# Altium PCB AICat V1.3.双面板 板厚1.6mm.PcbDoc (part 1 of 3)
Units mm, origin at the board's own origin, x right, y up, seen from the top; angles counter-clockwise.
Board outline 152.4 x 101.6 mm, 2 copper layers (Top Layer, Bottom Layer); 95 components, 81 nets, 296 pads, 205 vias.
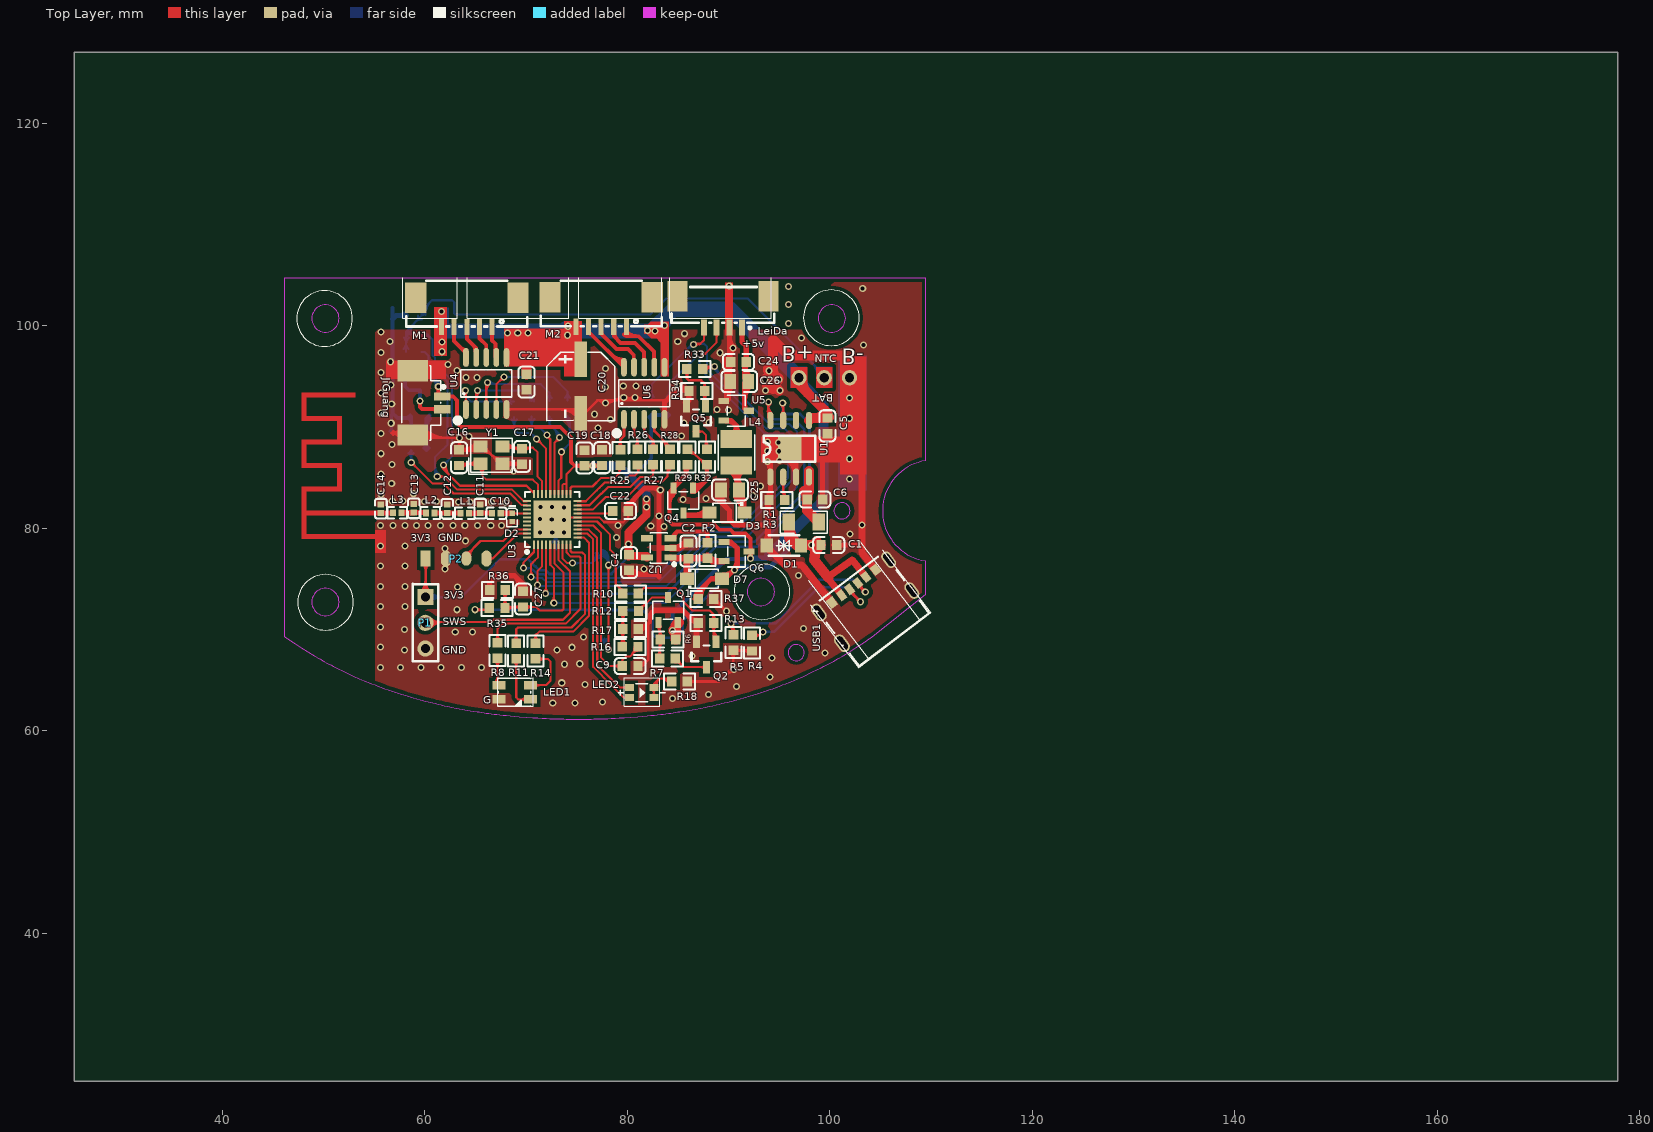
[diagram p0: Top Layer view]
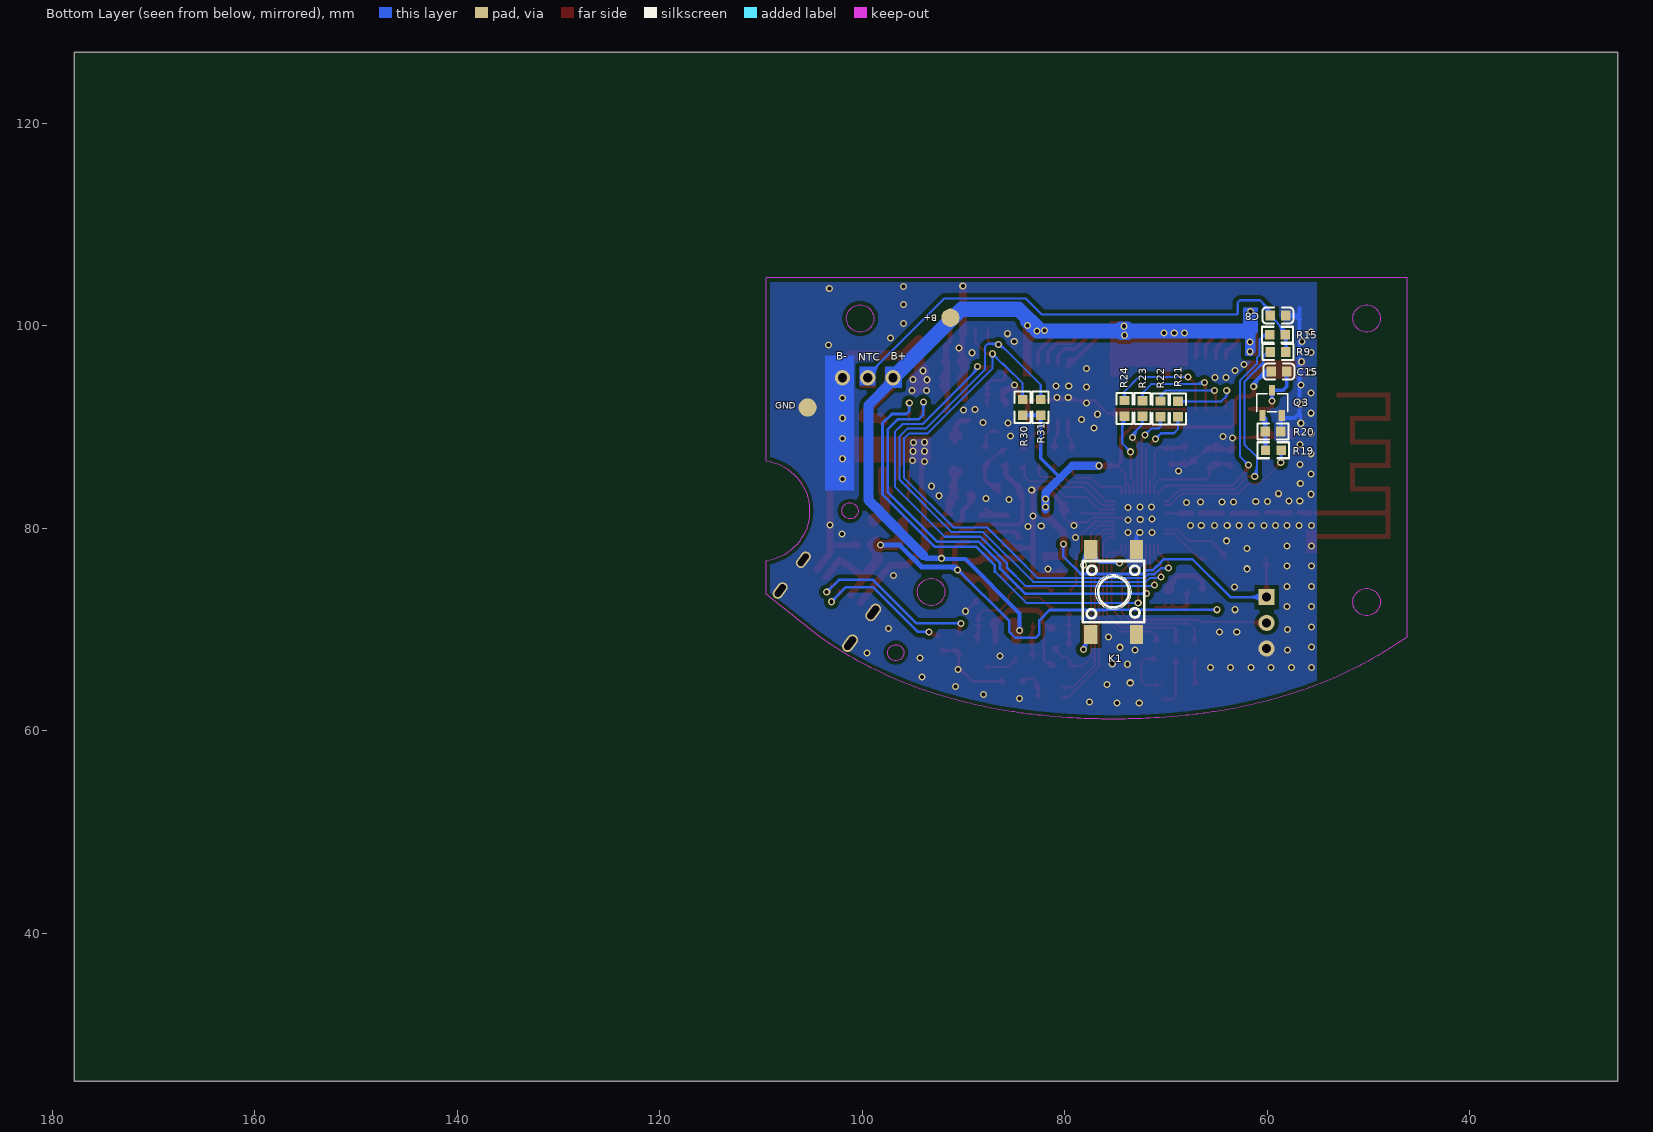
[diagram p1: Bottom Layer view, seen from below]
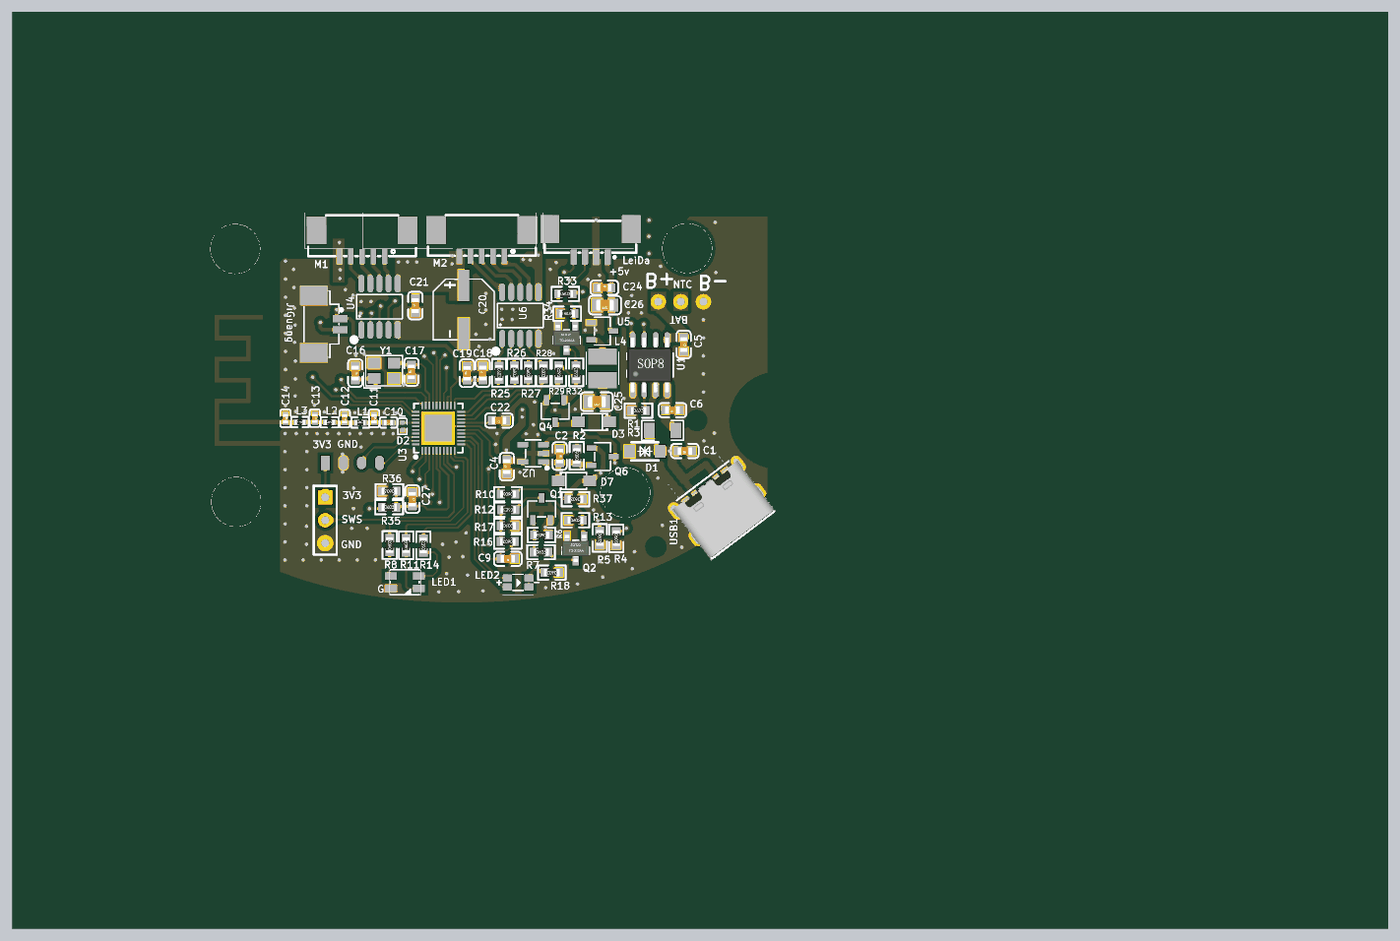
[diagram p4: 3D render of the assembled board from above, using the file's embedded part models]
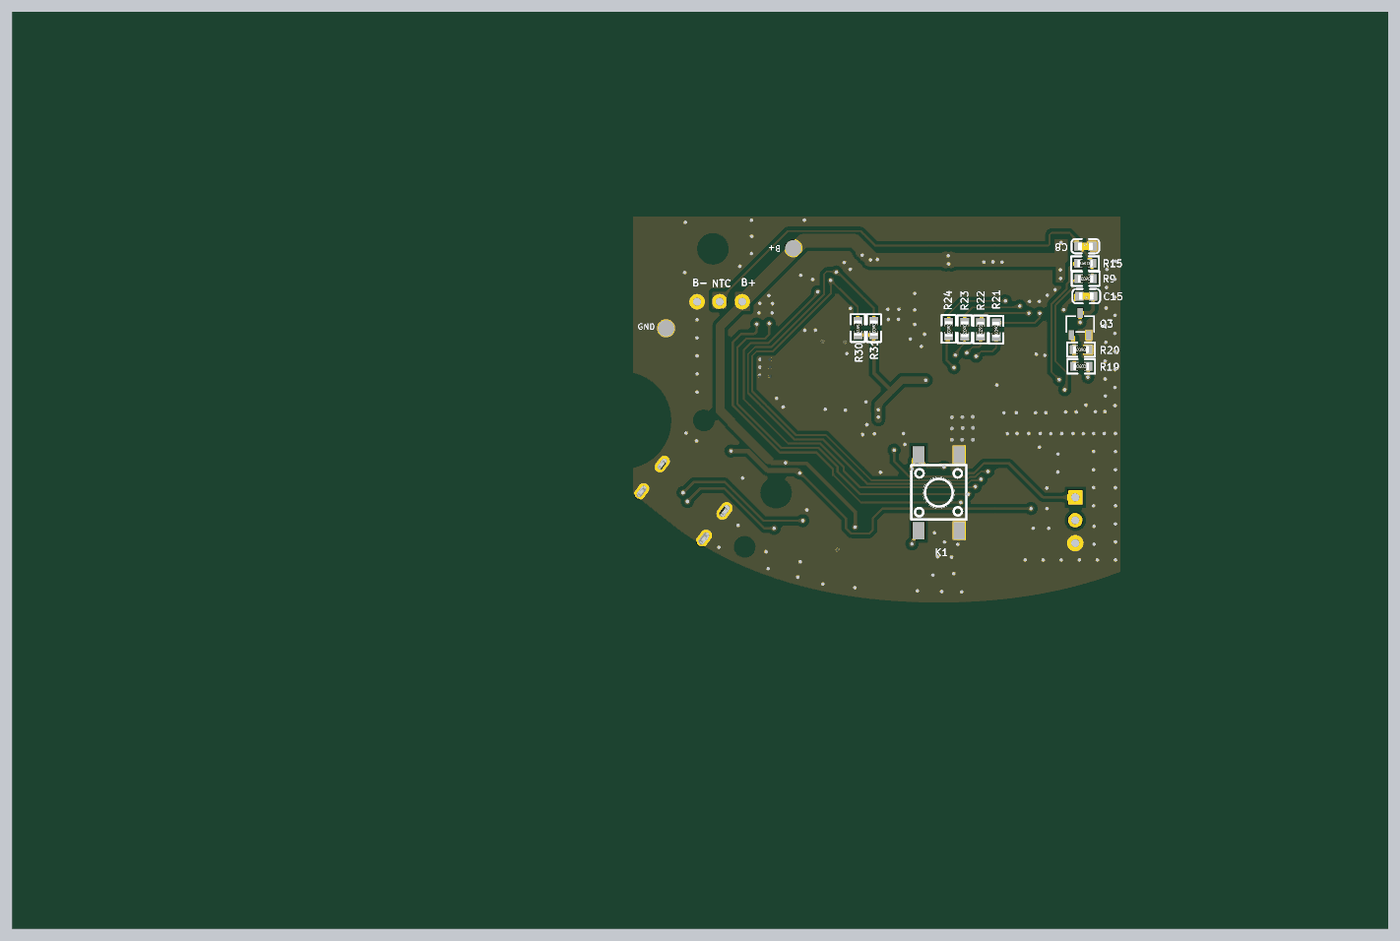
[diagram p5: 3D render of the assembled board from below, using the file's embedded part models]

## Layer stack, top to bottom
Top Solder: solder mask 0.0102, Solder Resist, Dk 3.5
Top Layer: signal copper 0.0356
Dielectric1: dielectric 0.32, FR-4, Dk 4.8
Bottom Layer: signal copper 0.0356
Bottom Solder: solder mask 0.0102, Solder Resist, Dk 3.5

## Board outline
25.4,25.4 177.8,25.4 177.8,127 25.4,127

## Design rules (kind name [scope] priority, off if disabled: settings)
Clearance [All] p1: gap=0.178 ignorepadtopadclearanceinfootprint=FALSE except(0: Arc-Hole Track-Hole SMDPad-Hole THPad-Hole Via-Hole Fill-Hole Poly-Hole Region-Hole Text-Hole)
ComponentClearance [All] p1: gap=0 collisioncheckmode=3 verticalgap=0 showdistances=FALSE
FabricationTestPointUsage TestPointUsage [All] p1: valid=0 allowmultiple=FALSE
FabricationTestpoint Testpoint [All] p1: side=3 testpointundercomponent=TRUE minsize=1.016 maxsize=2.54 preferedsize=1.524 minholesize=0 maxholesize=1.016 preferedholesize=0.813 testpointgrid=0.025 allowsidetop=TRUE allowsidebottom=TRUE usegrid=TRUE gridtolerance=0
HoleToHoleClearance [All] p1: gap=0.102 allowstackedmicrovias=TRUE
MinimumSolderMaskSliver [All] p1: minsoldermaskwidth=0.051
PolygonConnect [All] p1: connectstyle=Direct reliefconductorwidth=0.254 reliefentries=4 polygonreliefangle="90 Angle" airgapwidth=0.254
RoutingVias [All] p1: holewidth=0.711 width=1.27 viastyle="Through Hole" minholewidth=0.711 minwidth=1.27 maxholewidth=0.711 maxwidth=1.27
SilkToSilkClearance [All] p1: silktosilkclearance=0.051
SilkToSolderMaskClearance SilkscreenOverComponentPads [IsPad] p1: minsilkscreentomaskgap=0 clearancetoexposedcopper=TRUE
SolderMaskExpansion [All] p1: expansion=0.102
Width [All] p1: maxlimit=2.54 minlimit=0.203 preferedwidth=0.254 minimp=50.000000 maximp=50.000000 favimp=50.000000
23 further rules are at their usual default settings.

## Components (designator, comment, footprint, x,y, rotation, side; value= is the part's Value field where it differs from the comment)
B+ "J-CSD" TP 91.288,100.787 r270 bottom (schematic designator TP3)
BAT "BX-PH2.0-3PWT" HDR-TH_3P-P2.50_ZX-XH2.54-3PWZ 100.152,99.009 r180 top (schematic designator BAT1)
C1 "0.1uF" 0603_C 99.898,78.334 r180 top
C2 "1uf" 0603_C 86.03,77.775 r270 top
C4 "10uF" 0603_C 80.188,76.606 r90 top
C5 "10uf" 0603_C 99.771,90.119 r270 top
C6 "10UF" 0603_c 98.527,82.855 r180 top
C8 "100nF" 0603_C 58.953,101.016 r180 bottom
C9 "100nF" 0603_C 80.289,66.396 r180 top
C10 "220pF" 0402_c 67.081,81.483 r180 top
C11 "NC" 0402_C 65.481,81.94 r270 top
C12 "NC" 0402_C 62.23,81.915 r270 top
C13 "NC" 0402_C 58.928,81.966 r270 top
C14 "NC" 0402_C 55.677,81.94 r270 top
C15 "0.1uf/25v" 0603_C 58.852,95.479 r0 bottom
C16 "12PF" 0603_c 63.398,86.97 r270 top
C17 "12PF" 0603_c 69.621,87.097 r90 top
C18 "1UF" 0603_c 77.521,86.97 r90 top
C19 "1UF" 0603_c 75.768,86.944 r90 top
C20 "220uF/10V" "SMD 6.3*5.4 电解" 75.387,93.853 r270 top
C21 "100nf" 0603_C 70.053,94.437 r90 top
C22 "1UF" 0603_c 79.324,81.712 r180 top
C24 "0.1uF" 0603_C 90.983,96.418 r0 top
C25 "22uf-16v" 0805_c 90.145,83.795 r180 top
C26 "22uf-16v" 0805_c 91.059,94.488 r180 top
C27 "0.1uF" 0603_C 69.723,73 r270 top
D1 "SMF5.0CA_C726939" "SOD-123 双向" 95.631,78.232 r0 top
D2 "SE6V3LHN102T 6.3v单向" 0402-D 68.758,81.001 r270 top
D3 "DSK24" SOD-123FL 89.687,81.382 r180 top
D7 "" SOD-123FL 87.782,75.184 r0 top
GND "J-CSD" TP 105.385,91.923 r270 bottom (schematic designator TP3)
JiGuang "JiGuang" CONN-SMD_2P-P1.25-LT 60.274,92.38 r270 top (schematic designator CN1)
K1 "KEY" KEY_SMD_4P 75.184,73.762 r270 bottom locked
L1 "0R" 0402_R 63.957,81.483 r180 top
L2 "0R" 0402_R 60.554,81.509 r180 top
L3 "0R" 0402_R 57.277,81.534 r180 top
L4 "47uH" IND-SMD_L3.5-W3.0_CD31 90.78,87.503 r90 top
LED1 "XL-A3528RGBC-BM" LED-ARRAY-SMD_4P-L3.2-W2.8-LS3.5-BL_XL-A3528RGBC-BM 68.885,63.805 r0 top
LED2 "*" LED-SMD_4P-L3.2-W1.6-TL_XL-3216SURUGC 81.432,63.779 r0 top
LeiDa "HC-1.25-4PLT" CONN-SMD_4P-P1.25_LT 89.459,101.371 r180 top (schematic designator CN2)
M1 "MOTORA" CONN-SMD_1.25-5PLT 64.16,101.321 r180 top (schematic designator J1)
M2 "MOTORB" CONN-SMD_1.25-5PLT 77.419,101.346 r180 top (schematic designator J2)
P1 "DEBUG" SIP4-2.54#1 60.071,75.743 r270 top (schematic designator P2)
P2 "UART" SIP4-2.54#2 60.096,77.013 r0 top
Q1 "SI2301 P" SOT-23 84.252,71.399 r270 top
Q2 "S8050" SOT-23(SOT-23-3) 87.808,67.539 r90 top
Q3 "AO3400" SOT-23 59.309,91.872 r270 bottom
Q4 "SI2301 P" SOT-23 85.319,83.261 r90 top
Q5 "S8050" SOT-23(SOT-23-3) 86.792,90.83 r90 top
Q6 "CJ3401" SOT-23 90.272,77.495 r180 top
R1 "1.3k" 0603_R 94.767,82.804 r0 top
R2 "10k" 0603_R 87.935,77.8 r90 top
R3 "R250" 1206_R 97.282,80.569 r180 top
R4 "5.1K" 0603_R 92.304,68.656 r270 top
R5 "5.1K" 0603_R 90.475,68.707 r270 top
R6 "560K" 0603_R 84.023,69.037 r180 top
R7 "1K" 0603_R 83.972,67.132 r0 top
R8 "1k" 0603_R 67.208,67.92 r90 top
R9 "10k" 0603_R 58.928,97.409 r0 bottom
R10 "1K" 0603_r 80.315,73.558 r180 top
R11 "1k" 0603_R 69.037,67.894 r90 top
R12 "560K" 0603_R 80.34,71.831 r180 top
R13 "10K" 0603_r 87.782,70.663 r0 top
R14 "1k" 0603_R 70.942,67.869 r90 top
R15 "100R" 0603_R 58.979,99.111 r180 bottom
R16 "1K" 0603_R 80.289,68.301 r180 top
R17 "100K" 0603_R 80.315,70.053 r0 top
R18 "1K" 0603_R 85.166,64.872 r180 top
R19 "330R" 0603_R 59.411,87.706 r180 bottom
R20 "10K" 0603_R 59.436,89.56 r0 bottom
R21 "330R" 0603_R 68.834,91.77 r270 bottom
R22 "330R" 0603_R 70.561,91.796 r270 bottom
R23 "330R" 0603_R 72.314,91.821 r270 bottom
R24 "330R" 0603_R 74.092,91.846 r270 bottom
R25 "330R" 0603_R 79.324,86.995 r270 top
R26 "330R" 0603_R 81.026,87.02 r270 top
R27 "330R" 0603_R 82.55,87.046 r270 top
R28 "330R" 0603_R 84.226,87.046 r270 top
R29 "560K" 0603_R 85.954,87.046 r90 top
R30 "10K" 0603_R 84.15,91.948 r270 bottom
R31 "10K" 0603_R 82.372,91.948 r270 bottom
R32 "1K" 0603_R 87.859,87.046 r90 top
R33 "1K" 0603_r 86.665,95.733 r0 top
R34 "10K" 0603_r 86.868,93.548 r0 top
R35 "10K" 0603_R 67.158,72.111 r0 top
R36 "20K" 0603_R 67.183,73.889 r180 top
R37 "10K" 0603_R 87.782,73 r180 top
U1 "TP4056X" SOP8-9 96.037,87.859 r0 top
U2 "SSP7615" SOT-23-5 82.931,77.622 r180 top
U3 "TLSR8208C" QFN-40_L5.0-W5.0-P0.40-BL-EP3.7 72.644,80.797 r0 top
U4 "ULN2802" ESSOP-10 66.218,94.107 r0 top
U5 "HE9116A50NR" SOT-23 90.246,91.389 r180 top
U6 "ULN2802" ESSOP-10 81.813,93.142 r0 top
USB1 "TYPE-C 6P" TPYE-C-6 103.505,72.771 r127 top
Y1 "24MHz +-20PPM" CRYSTAL-SMD_4P-L3.2-W2.5 66.878,87.173 r0 top

## Footprints (in the part's own frame and the unit in brackets; to place one, negate y for a bottom-side part, rotate by r counter-clockwise, add the part's x,y. Pads: shape width x height; smd on the part's side, far side on the other; paste and mask are expansions set on the pad)
0402-D [mm]
  rect 0.505x0.551 smd paste-100 mask+0.051: 1(-0.484,-0.131) 2(0.349,-0.131)
  silkscreen extent -1.27,-0.64 0.83,0.37
0402_c [mm]
  rect 0.6x0.65 smd: 1(-0.425,0) 2(0.425,0)
  silkscreen extent -0.98,-0.58 0.98,0.58, body extent -0.48,-0.3 0.52,0.3, height 0.2
0402_C [mm]
  rect 0.6x0.65 smd: 1(-0.425,0) 2(0.425,0)
  silkscreen extent -0.98,-0.58 0.98,0.58, body extent -0.48,-0.3 0.52,0.3, height 0.2
0402_R [mm]
  rect 0.6x0.65 smd: 1(-0.425,0) 2(0.425,0)
  silkscreen extent -0.97,-0.58 0.97,0.58, body extent -0.57,-0.27 0.58,0.28, height 0.41
0603_C [mm]
  rect 0.93x0.98 smd: 1(-0.77,0) 2(0.77,0)
  silkscreen extent -1.54,-0.79 1.54,0.79, body extent -0.8,-0.4 0.8,0.4, height 0.3
0603_c [mm]
  rect 0.93x0.98 smd: 1(-0.77,0) 2(0.77,0)
  silkscreen extent -1.54,-0.79 1.54,0.79, body extent -0.8,-0.4 0.8,0.4, height 0.3
0603_R [mm]
  rect 0.93x0.98 smd: 1(-0.77,0) 2(0.77,0)
  silkscreen extent -1.53,-0.79 1.54,0.79, body extent -0.85,-0.4 0.85,0.4, height 0.56
0603_r [mm]
  rect 0.93x0.98 smd: 1(-0.77,0) 2(0.77,0)
  silkscreen extent -1.53,-0.79 1.54,0.79, body extent -0.85,-0.4 0.85,0.4, height 0.56
0805_c [mm]
  rect 1.16x1.47 smd: 1(-0.89,0) 2(0.89,0)
  silkscreen extent -1.77,-1.04 1.77,1.04, body extent -1,-0.62 1,0.63, height 0.77
1206_R [mm]
  rect 1.208x1.701 smd: 1(-1.631,-0.039) 2(1.326,-0.039)
  silkscreen extent -2.46,-1.12 2.16,1.04
CONN-SMD_1.25-5PLT [mm]
  rect 0.5x1.6 smd paste+0.051: 1(-2.5,1.45) 2(-1.25,1.45) 3(0,1.45) 4(1.25,1.45) 5(2.5,1.45)
  rect 2.1x3 smd paste+0.051: 6(-5.05,-1.45) 7(5.05,-1.45)
  silkscreen extent -5.97,-3.12 5.97,1.4
CONN-SMD_2P-P1.25-LT [mm]
  rect 0.8x1.6 smd paste+0 mask+0.05: 1(-0.625,1.45) 2(0.625,1.45)
  rect 2.1x3 smd paste+0 mask+0.05: 3(-3.175,-1.45) 4(3.175,-1.45)
  silkscreen extent -3.68,-2.55 3.68,1.73
CONN-SMD_4P-P1.25_LT [mm]
  rect 0.6x1.6 smd paste+0.051: 1(-1.875,1.55) 2(-0.625,1.55) 3(0.625,1.55) 4(1.875,1.55)
  rect 2x3 smd paste+0.051: 5(-4.5,-1.55) 6(4.5,-1.55)
  silkscreen extent -5.06,-2.45 5.09,1.7
CRYSTAL-SMD_4P-L3.2-W2.5 [mm]
  rect 1.4x1.2 smd: 1(-1.383,-0.797) 2(0.817,-0.797) 3(0.817,0.903) 4(-1.383,0.903)
  silkscreen extent -2.54,-1.85 1.75,1.73
ESSOP-10 [mm]
  oval 0.56x1.855 smd paste+0.051: 1(-2.141,-2.375) 2(-1.141,-2.375) 3(-0.141,-2.375) 4(0.859,-2.375) 5(1.859,-2.375) 6(1.859,2.765) 7(0.859,2.765) 8(-0.141,2.765) 9(-1.141,2.765) 10(-2.141,2.765)
  silkscreen extent -2.67,-1.14 2.39,1.53
HDR-TH_3P-P2.50_ZX-XH2.54-3PWZ [mm]
  round 1.5 hole 0.9: 1(-1.801,4.145) 2(0.699,4.145) 3(3.199,4.145)
IND-SMD_L3.5-W3.0_CD31 [mm]
  rect 1.8x3.12 smd: 1(-1.303,0) 2(1.303,0)
  silkscreen extent -1.75,-1.8 1.75,1.8
KEY_SMD_4P [mm]
  rect 1.9x1.3 smd: 1(-4.155,2.252) 2(4.244,2.252) 3(-4.155,-2.247) 4(4.244,-2.247)
  silkscreen extent -3.01,-3.05 3.02,3.05
LED-ARRAY-SMD_4P-L3.2-W2.8-LS3.5-BL_XL-A3528RGBC-BM [mm]
  rect 1.3x0.82 smd paste+0 mask+0.05: 1(-1.55,-0.7) 2(-1.55,0.7) 3(1.55,-0.7) 4(1.55,0.7)
  silkscreen extent -1.6,-1.4 1.6,1.4
LED-SMD_4P-L3.2-W1.6-TL_XL-3216SURUGC [mm]
  rect 0.9x0.7 smd paste+0.051: 1(-1.2,0.5) 2(1.2,0.5) 3(-1.2,-0.5) 4(1.2,-0.5)
  silkscreen extent -2.33,-0.89 2.3,0.89
QFN-40_L5.0-W5.0-P0.40-BL-EP3.7 [mm]
  rect 0.2x0.8 smd paste-100 mask+0.05: 1(-1.847,-2.425) 2(-1.447,-2.425) 3(-1.047,-2.425) 4(-0.647,-2.425) 5(-0.247,-2.425) 6(0.153,-2.425) 7(0.553,-2.425) 8(0.953,-2.425) 9(1.353,-2.425) 10(1.753,-2.425) 21(1.753,2.573) 22(1.353,2.573) 23(0.953,2.573) 24(0.553,2.573) 25(0.153,2.573) 26(-0.247,2.573) 27(-0.647,2.573) 28(-1.047,2.573) 29(-1.447,2.573) 30(-1.847,2.573)
  rect 0.8x0.2 smd paste-100 mask+0.05: 11(2.452,-1.726) 12(2.452,-1.326) 13(2.452,-0.926) 14(2.452,-0.526) 15(2.452,-0.126) 16(2.452,0.274) 17(2.452,0.674) 18(2.452,1.074) 19(2.452,1.474) 20(2.452,1.874) 31(-2.546,1.874) 32(-2.546,1.474) 33(-2.546,1.074) 34(-2.546,0.674) 35(-2.546,0.274) 36(-2.546,-0.126) 37(-2.546,-0.526) 38(-2.546,-0.926) 39(-2.546,-1.326) 40(-2.546,-1.726)
  rect 3.7x3.7 smd paste-100 mask+0.05: 41(-0.047,0.074)
  silkscreen extent -2.75,-3.28 2.65,2.77
SIP4-2.54#1 [mm]
  rect 1.6x1.6 hole 0.9: 2(2.54,0)
  round 1.6 hole 0.9: 3(5.08,0) 4(7.62,0)
  silkscreen extent 1.24,-1.27 8.89,1.27
SIP4-2.54#2 [mm]
  rect 1x1.6 smd: 1(0,0)
  oval 1x1.6 smd: 2(2,0) 4(6,0)
  oval 1x1.4 smd: 3(4,0)
"SMD 6.3*5.4 电解" [mm]
  rect 3.5x1.2 smd: 1(-2.822,0.023) 2(2.518,0.023)
  silkscreen extent -3.53,-3.35 3.22,3.4
"SOD-123 双向" [mm]
  rect 1.2x1.4 smd: 1(-1.864,0.06) 2(1.536,0.06)
  silkscreen extent -1.66,-0.94 1.34,1.06
SOD-123FL [mm]
  rect 1.4x1.2 smd: 1(1.579,-0.166) 2(-1.891,-0.166)
  silkscreen extent -1.76,-1.17 1.22,0.84
SOP8-9 [mil]
  oval 24x66.93 smd: 1(-75,-110) 2(-25,-110) 3(25,-110) 4(75,-110) 5(75,110) 6(25,110) 7(-25,110) 8(-75,110)
  rect 90.55x90.55 smd: 9(0,0)
  silkscreen extent -100,-50 100,50, body extent -100,-119 98,119, height 63
SOT-23 [mm]
  rect 1.07x0.6 smd: 1(0.719,-1.166) 2(0.719,0.734) 3(-1.751,-0.216)
  silkscreen extent -1.39,-1.75 0.36,1.32
SOT-23(SOT-23-3) [mm]
  rect 1.25x0.7 smd: 1(1.25,-0.95) 2(1.25,0.95) 3(-1.25,0)
  silkscreen extent -0.65,-1.46 0.9,1.46, body extent -1.5,-1.5 1.5,1.5, height 1.3
SOT-23-5 [mm]
  rect 1.2x0.6 smd paste+0 mask+0.05: 1(-1.325,0.51) 2(-1.325,-0.44) 3(-1.325,-1.39) 4(0.975,-1.39) 5(0.975,0.51)
  silkscreen extent -1.85,-1.94 0.67,1.32
TP [mm]
  round 1.8 smd: 1(0,0)
TPYE-C-6 [mm]
  oval 1.9x1.1 hole 0.7 slot 1.5 at 0 deg: 7(-1.9,4.32) 7(1.9,4.32)
  oval 1.8x1 hole 0.6 slot 1.4 at 0 deg: 7(-1.9,-4.32) 7(1.9,-4.32)
  rect 1x0.7 smd: A5(1.9,0.5) A9(1.9,-1.5) B5(1.9,-0.5) B9(1.9,1.5)
  rect 1x0.8 smd: A12(1.9,-2.7) B12(1.9,2.7)
  silkscreen extent -4.7,-4.32 2.79,4.65, body extent -4.55,-4.45 2.25,4.49, height 3.41

## Part data
C1 C4 C5 C15 C24 C27: library part Cap, "Capacitor"
C2 C21 C25 C26: library part Cap1, "无极电容"
C6 C8 C9 C18 C19 C22: library part CAP
C10 C11 C12 C13 C14 C16 C17: library part CAP, "Capacitor"
C20: library part RVT1A221M0605_C72494
D2: library part TPNSR05F20NXT5G
D3 D7: library part "Diode 1N4148", "High Conductance Fast Diode"
JiGuang: library part HC-1.25-2PLT
K1: library part TS-1002S-05026C
L1 L2 L3: library part INDUCTOR
L4: library part "CD31-470M 47UH"
LED2: library part TJ-S2012SW8TCGLC2R2G-A5
M1 M2: library part HC-1.25-5PLT
P1 P2: library part "Header 4", "Header, 4-Pin"
Q1 Q3 Q4: library part JMTL3400A
Q2 Q5: library part NPN_sot23, "NPN三极管"
R1 R3 R4 R5 R6 R7 R8 R11 R12 R14 R16 R17 R18 R20 R29 R30 R31 R32 R35 R36: library part RES
R2 R9 R10 R13 R15 R19 R21 R22 R23 R24 R25 R26 R27 R28 R33 R34 R37: library part Res2, "Resistor"
U1: library part TP4056, "TP4056"
U2: library part SSP7615-33M5R
U4 U6: library part ULN2802_C2828555
USB1: library part "TYPE-C 6P LTH6.5"
Y1: library part TAXM13.56M4RLBCCT2T

## Via types
v1: diameter 0.7, hole 0.4, Top Layer to Bottom Layer, tented both sides, 205 vias

## Nets (pads, with @x,y where several pads share a name; then routed paths per layer and width w, separated by ;. In a path a pad name is that pad's centre, name@x,y a point inside that pad or via, vN(x,y) a via of type N, cw(c..) or ccw(c..) an arc to the next point about the centre after c; other vN are vias at no path point)
3V3: C4.2 C15.2 C18.1 C19.1 JiGuang.1 P1.2 P2.1 R30.2 R31.2 U2.5 U3.22 U3.23 | length 137.7
  Top Layer w0.203: U3.23@73.597,83.371 73.597,84.265 73.711,84.379 73.997,84.379 ; U3.22@73.997,83.371 73.997,84.379 ; 74.828,86.174 73.997,85.343 73.997,84.379
  Top Layer w0.254: P1.2@60.071,73.203 60.096,73.228 P2.1@60.096,77.013 ; 60.096,75.812 cw(c60.997,75.812) 60.36,76.449 ccw(c60.997,75.812) 60.096,75.812 ; 60.096,75.812 ccw(c59.196,75.812) 59.833,76.449 cw(c59.196,75.812) 60.096,75.812 ; P1.2@59.595,73.679 ccw(c58.385,74.889) 60.096,74.889 cw(c58.385,74.889) P1.2@59.595,73.679 ; P1.2@59.775,73.499 ccw(c58.998,74.276) 60.096,74.276 cw(c58.998,74.276) P1.2@59.775,73.499 ; 60.096,74.153 ccw(c61.021,74.153) 60.367,73.499 cw(c61.021,74.153) 60.096,74.153 ; 60.096,74.766 ccw(c61.634,74.766) 60.547,73.679 cw(c61.634,74.766) 60.096,74.766
  Top Layer w0.381: v1(61.341,93.98) 61.341,93.388 JiGuang.1@61.724,93.005 62.824,93.005 63.195,92.634 63.195,90.424 63.602,90.018 73.387,90.018 74.447,88.957 74.447,86.538 74.811,86.174 ; 74.828,86.174 C19.1@75.768,86.174 v1(76.632,86.174) C18.1@77.495,86.174 ; 61.341,93.595 cw(c61.726,93.595) 61.454,93.867 ccw(c61.726,93.595) 61.341,93.595 ; 61.341,93.595 ccw(c60.956,93.595) 61.228,93.867 cw(c60.956,93.595) 61.341,93.595 ; 62.63,93.005 cw(c62.63,93.511) 62.272,93.153 ccw(c62.63,93.511) 62.63,93.005 ; 62.63,93.005 ccw(c62.63,92.499) 62.272,92.857 cw(c62.63,92.499) 62.63,93.005 ; 75.081,86.174 cw(c75.081,85.511) 75.549,85.98 ccw(c75.081,85.511) 75.081,86.174 ; 75.081,86.174 ccw(c75.081,86.837) 75.549,86.368 cw(c75.081,86.837) 75.081,86.174 ; C19.1@76.247,86.174 cw(c76.247,85.789) 76.519,86.061 ccw(c76.247,85.789) C19.1@76.247,86.174 ; C19.1@76.247,86.174 ccw(c76.247,86.559) 76.519,86.287 cw(c76.247,86.559) C19.1@76.247,86.174 ; v1@76.456,86.174 cw(c76.456,86.837) 75.987,86.368 ccw(c76.456,86.837) v1@76.456,86.174 ; v1@76.456,86.174 ccw(c76.456,85.511) 75.987,85.98 cw(c76.456,85.511) v1@76.456,86.174 ; 77.017,86.174 cw(c77.017,86.559) 76.745,86.287 ccw(c77.017,86.559) 77.017,86.174 ; 77.017,86.174 ccw(c77.017,85.789) 76.745,86.061 cw(c77.017,85.789) 77.017,86.174 ; JiGuang.1@61.176,93.153 ccw(c60.778,93.551) 61.341,93.551 cw(c60.778,93.551) JiGuang.1@61.176,93.153 ; 61.341,93.47 ccw(c61.789,93.47) 61.472,93.153 cw(c61.789,93.47) 61.341,93.47 ; v1@76.772,86.174 ccw(c76.772,86.924) 77.302,86.394 cw(c76.772,86.924) v1@76.772,86.174 ; v1@76.894,86.174 cw(c76.894,85.598) 77.302,86.005 ccw(c76.894,85.598) v1@76.894,86.174
  Top Layer w0.8: C4.2@80.137,77.217 v1(80.137,78.435) ; C4.2@80.137,77.266 U2.5@81.93,77.266 ; C4.2@80.137,77.836 ccw(c80.832,77.836) C4.2@80.34,77.344 ; 80.137,77.978 v1(80.137,78.435) ; v1@81.882,82.829 81.882,81.323 80.137,79.578 v1(80.137,78.435) ; U2.5@81.93,77.139 U2.5@81.956,77.113
  Bottom Layer w0.254: P1.2@60.071,73.203 63.652,73.203 67.412,76.962 70.18,76.962 70.906,76.236 70.939,76.236 71.305,75.87 71.933,75.87 72.314,75.489 78.461,75.489 78.461,75.514 80.137,77.191 80.137,77.953 ; v1@79.992,78.265 cw(c79.726,77.953) 80.137,77.953 ; 80.137,77.648 80.137,77.953 ; v1(80.137,78.435) 80.137,77.953 ; v1@80.282,78.265 ccw(c80.548,77.953) 80.137,77.953 ; 61.083,73.203 cw(c61.083,74.214) 60.367,73.499 ccw(c61.083,74.214) 61.083,73.203 ; 61.083,73.203 ccw(c61.083,72.191) 60.367,72.907 cw(c61.083,72.191) 61.083,73.203 ; 61.696,73.203 cw(c61.696,74.828) 60.547,73.679 ccw(c61.696,74.828) 61.696,73.203 ; 61.696,73.203 ccw(c61.696,71.578) 60.547,72.727 cw(c61.696,71.578) 61.696,73.203
  Bottom Layer w0.381: C15.2@59.622,95.479 60.198,95.479 ; v1@61.235,94.099 ccw(c61.024,94.336) 61.341,94.336 ; v1(61.341,93.98) 61.341,94.336 ; v1@61.447,94.099 cw(c61.658,94.336) 61.341,94.336 ; 80.772,84.658 80.442,84.988 82.372,86.919 R31.2@82.372,91.178 R30.2@84.15,91.178 ; 60.198,95.479 cw(c60.198,95.946) 59.835,95.652 ccw(c60.198,95.946) 60.198,95.479 ; 60.198,95.479 ccw(c60.198,95.011) 59.835,95.306 cw(c60.198,95.011) 60.198,95.479 ; 60.198,95.479 61.341,94.336 ; 82.372,90.515 cw(c83.035,90.515) 82.566,90.984 ccw(c83.035,90.515) 82.372,90.515 ; 82.372,90.515 ccw(c81.709,90.515) 82.178,90.984 cw(c81.709,90.515) 82.372,90.515 ; 83.06,91.178 cw(c83.06,91.841) 82.591,91.372 ccw(c83.06,91.841) 83.06,91.178 ; 83.06,91.178 ccw(c83.06,90.515) 82.591,90.984 cw(c83.06,90.515) 83.06,91.178 ; 83.463,91.178 cw(c83.463,90.515) 83.931,90.984 ccw(c83.463,90.515) 83.463,91.178 ; 83.463,91.178 ccw(c83.463,91.841) 83.931,91.372 cw(c83.463,91.841) 83.463,91.178 ; C15.2@59.559,95.539 cw(c59.844,95.151) 60.185,95.492 ccw(c59.844,95.151) C15.2@59.559,95.539 ; C15.2@59.622,95.179 cw(c59.622,93.065) 61.117,94.56 ccw(c59.622,93.065) C15.2@59.622,95.179 ; C15.2@59.622,95.56 cw(c59.622,94.366) 60.466,95.21 ccw(c59.622,94.366) C15.2@59.622,95.56 ; C15.2@59.784,95.232 cw(c60.11,94.789) 60.499,95.178 ccw(c60.11,94.789) C15.2@59.784,95.232 ; 60.817,94.859 cw(c59.938,93.98) 61.182,93.98 ccw(c59.938,93.98) 60.817,94.859
  Bottom Layer w0.8: v1(76.632,86.174) 79.256,86.174 80.442,84.988 ; 80.772,84.658 81.89,83.541 v1(81.89,82.906) v1(81.89,82.093) v1@81.89,81.839 ; 81.526,83.904 cw(c80.527,82.906) 81.94,82.906 ccw(c80.527,82.906) 81.526,83.904
+5V: C24.2 C26.1 LeiDa.1 U5.3 | length 19.3
  Top Layer w0.508: LeiDa.1@91.334,99.821 91.334,98.404 91.753,97.985 C24.2@91.753,96.418 ; U5.3@91.592,91.832 C26.1@91.592,94.412 ; C24.2@91.897,96.418 C24.2@91.753,96.418 ; C26.1@91.997,94.389 91.593,94.793 91.593,96.418 C24.2@91.753,96.418 ; 91.753,96.953 cw(c91.243,96.953) 91.604,96.593 ccw(c91.243,96.953) 91.753,96.953 ; 91.753,96.953 ccw(c92.262,96.953) 91.902,96.593 cw(c92.262,96.953) 91.753,96.953 ; 91.592,92.127 ccw(c92.283,92.127) 91.795,91.638 cw(c92.283,92.127) 91.592,92.127 ; 91.592,92.685 cw(c93.597,92.685) 92.18,94.102 ccw(c93.597,92.685) 91.592,92.685 ; 91.593,95.499 cw(c92.647,95.499) 91.902,96.244 ccw(c92.647,95.499) 91.593,95.499 ; C24.2@91.593,96.289 ccw(c93.595,96.289) 92.18,94.874 cw(c93.595,96.289) C24.2@91.593,96.289
AD_BAT: C9.2 R16.1 U3.14 | length 26.1
  Top Layer w0.203: U3.14@75.096,80.271 76.65,80.271 77.419,79.502 77.419,67.234 78.257,66.396 C9.2@79.519,66.396 79.519,66.997 ; C9.2@79.262,66.139 ccw(c78.642,65.518) 78.642,66.396 ccw(c78.642,67.273) C9.2@79.262,66.653 ; 80.362,67.433 ccw(c79.554,68.241) R16.1@80.696,68.267 ; 80.51,67.581 ccw(c79.816,68.276) R16.1@80.798,68.276 ; 80.614,67.686 cw(c81.161,67.139) R16.1@81.161,67.912 ; 80.686,67.758 cw(c81.059,67.385) R16.1@81.059,67.912 ; 80.698,67.769 ccw(c80.211,68.256) R16.1@80.899,68.272 ; R16.1@81.161,68.301 81.161,68.232 80.289,67.361 79.883,67.361 79.519,66.997 ; 79.519,66.997 cw(c79.244,66.997) 79.363,66.748 ccw(c79.244,66.997) 79.519,66.997 ; 79.519,66.997 ccw(c79.795,66.997) 79.676,66.748 cw(c79.795,66.997) 79.519,66.997
AD_NTC: R15.1 U3.30 | length 38
  Top Layer w0.203: v1(61.849,86.233) 61.849,85.838 ; U3.30@70.797,83.371 70.797,83.457 70.053,84.201 63.486,84.201 61.849,85.838 ; 61.849,85.838 cw(c62.039,85.838) 61.957,86.009 ccw(c62.039,85.838) 61.849,85.838 ; 61.849,85.838 ccw(c61.659,85.838) 61.741,86.009 cw(c61.659,85.838) 61.849,85.838 ; v1@61.691,86.233 ccw(c62.263,86.233) 61.858,85.829 cw(c62.263,86.233) v1@61.691,86.233 ; v1@61.894,86.233 ccw(c62.957,86.233) 62.205,85.482 cw(c62.957,86.233) v1@61.894,86.233 ; v1@62.097,86.233 ccw(c63.65,86.233) 62.552,85.135 cw(c63.65,86.233) v1@62.097,86.233
  Bottom Layer w0.203: R15.1@59.749,99.111 60.3,99.111 60.757,98.654 60.757,97.104 61.036,96.825 61.036,96.246 62.713,94.57 62.713,87.097 v1(61.849,86.233) ; 62.273,86.657 cw(c61.849,87.081) 61.849,86.481 ccw(c61.849,87.081) 62.273,86.657 ; 62.273,86.657 ccw(c62.697,86.233) 62.097,86.233 cw(c62.697,86.233) 62.273,86.657 ; R15.1@59.698,99.327 cw(c59.821,98.737) 60.247,99.163 ccw(c59.821,98.737) R15.1@59.698,99.327 ; R15.1@59.74,99.128 cw(c59.913,98.298) 60.513,98.897 ccw(c59.913,98.298) R15.1@59.74,99.128 ; R15.1@59.782,98.929 cw(c60.005,97.858) 60.779,98.632 ccw(c60.005,97.858) R15.1@59.782,98.929
BAT+: B+.1 BAT.3 C5.1 C20.1 C21.2 M1.5 M2.5 Q1.2 Q4.2 Q6.3 R6.1 R29.1 U1.5 U4.6 U6.6 | length 147.3
  Top Layer w0.203: M1.5@61.584,99.693 61.584,98.106 v1@61.62,98.069 ; C21.2@69.742,95.207 C21.2@70.053,95.207 ; 73.304,97.739 73.355,97.739 74.699,96.396 C20.1@75.605,97.302 ; 61.584,98.778 cw(c62.203,98.778) 61.765,99.216 ccw(c62.203,98.778) 61.584,98.778 ; 61.584,98.841 ccw(c62.164,98.841) 61.754,98.432 cw(c62.164,98.841) 61.584,98.841 ; M1.5@61.584,99.332 ccw(c62.654,99.332) 61.898,98.575 cw(c62.654,99.332) M1.5@61.584,99.332 ; 74.663,96.36 cw(c74.999,96.023) 75.252,96.425 ccw(c74.999,96.023) 74.663,96.36
  Top Layer w0.381: v1@81.966,99.771 82.398,100.203 ccw(c82.998,99.603) v1@82.15,99.552 ; v1@82.017,99.365 82.448,98.933 ; v1@82.151,99.543 ccw(c82.904,99.543) 82.371,99.01 ; 82.956,98.933 83.388,98.501 ; 84.176,82.289 cw(c85.838,82.289) Q4.2@84.662,83.465 ; 84.176,83.018 cw(c84.59,83.018) 84.586,83.433 ; 84.176,83.209 cw(c84.918,83.209) Q4.2@84.393,83.734 ; 84.176,83.403 cw(c84.586,83.403) Q4.2@84.582,83.813 ; 84.257,83.297 cw(c84.585,82.969) 84.585,83.432 ; 84.313,83.352 ccw(c83.92,83.745) Q4.2@84.475,83.745 ; Q4.2@84.712,83.752 84.458,83.498 84.176,83.215 84.176,80.67 84.48,80.366 88.595,80.366 89.103,79.858 90.195,79.858 90.551,79.502 91.669,79.502 92.177,78.994 92.177,78.003 92.177,77.712 v1@92.177,76.886 ; v1@92.038,77.151 ccw(c91.705,77.485) Q6.3@92.177,77.485 ; v1@92.177,77.252 cw(c92.718,77.252) Q6.3@92.335,77.634 ; 92.177,78.172 ccw(c92.718,78.172) Q6.3@92.335,77.789
  Top Layer w0.508: 84.458,83.244 84.458,83.498 84.458,83.925 85.801,85.268 R29.1@85.801,86.301 ; 84.458,83.328 cw(c85.003,83.328) Q4.2@84.618,83.713 ; Q4.2@84.585,84.261 ccw(c84.585,84.767) 84.943,84.409 ; 85.801,85.459 cw(c86.746,85.459) 86.078,86.127 ccw(c86.746,85.459) 85.801,85.459
  Top Layer w1: 70.028,96.418 70.053,96.393 C21.2@70.053,95.207 ; R6.1@84.793,69.037 84.793,70.387 Q1.2@85.087,70.68 ; Q1.2@84.793,70.219 cw(c85.314,70.219) Q1.2@84.946,70.587 ; BAT.3@96.953,94.864 97.155,94.662 97.155,94.005 99.771,91.389 C5.1@99.771,90.965 ; U1.5@97.942,90.653 98.179,90.889 C5.1@99.771,90.889 C5.1@99.771,90.965 ; 98.966,90.965 C5.1@99.771,90.965 ; C5.1@99.916,90.965 C5.1@99.771,90.965 ; v1@84.561,69.795 ccw(c84.001,70.355) 84.793,70.355 cw(c84.001,70.355) v1@84.561,69.795 ; v1@84.561,70.007 cw(c84.001,69.447) 84.793,69.447 ccw(c84.001,69.447) v1@84.561,70.007 ; BAT.3@96.807,94.661 cw(c96.318,93.982) 97.155,93.982 ccw(c96.318,93.982) BAT.3@96.807,94.661 ; BAT.3@97.203,94.864 ccw(c99.392,94.864) 97.844,93.316 cw(c99.392,94.864) BAT.3@97.203,94.864 ; 99.435,91.726 cw(c98.598,90.889) 99.781,90.889 ccw(c98.598,90.889) 99.435,91.726
  Bottom Layer w0.203: 61.265,97.46 61.646,97.079
  Bottom Layer w0.254: 61.062,99.441 61.671,98.831 ; 61.481,99.022 cw(c61.197,98.738) v1@61.534,98.52 ; 61.703,98.799 cw(c61.468,98.563) v1@61.748,98.383 ; 61.072,99.431 cw(c60.041,98.4) 61.499,98.4 ccw(c60.041,98.4) 61.072,99.431 ; 61.506,98.997 cw(c60.908,98.4) 61.753,98.4 ccw(c60.908,98.4) 61.506,98.997
  Bottom Layer w0.381: v1@84.342,70.014 ccw(c84.07,70.286) 84.455,70.286 ccw(c84.84,70.286) v1@84.568,70.014 ; v1(84.455,69.901) 84.455,71.603 89.814,76.962 92.126,76.962 92.202,76.886 v1@92.177,76.886 ; 91.582,76.962 ccw(c91.582,77.607) v1@92.038,77.151 ; 93.675,77.038 94.691,78.054
  Bottom Layer w0.508: v1(92.151,77.038) 93.675,77.038
  Bottom Layer w1: 93.997,77.36 94.691,78.054 98.171,81.534 98.171,81.569 99.382,82.78 99.382,92.151 97.028,94.505 97.028,94.789 BAT.3@96.953,94.864 ; BAT.3@97.203,94.864 ccw(c98.492,94.864) 97.58,93.953 cw(c98.492,94.864) BAT.3@97.203,94.864
  Bottom Layer w1.5: 62.034,99.492 70.206,99.492 74.143,99.492 v1(82.753,99.492) ; v1@82.461,99.53 84.557,101.625 90.192,101.625 BAT.3@96.953,94.864 ; 83.136,100.205 cw(c83.668,99.674) 83.668,100.425 ; 83.268,100.025 cw(c84.019,100.025) 83.488,100.556 ; 73.834,99.343 cw(c74.194,98.983) 74.194,99.492 ccw(c74.194,98.983) 73.834,99.343 ; 73.86,99.666 ccw(c74.281,100.087) 74.281,99.492 cw(c74.281,100.087) 73.86,99.666 ; 74.005,99.492 ccw(c74.005,100.087) 74.425,99.666 cw(c74.005,100.087) 74.005,99.492 ; 74.04,99.492 cw(c74.04,98.983) 74.4,99.343 ccw(c74.04,98.983) 74.04,99.492
  other v1: 61.697,97.434 61.722,98.4 74.117,99.06 68.174,99.263 70.206,99.263 69.19,99.289 81.991,99.543 74.143,99.949 83.668,100.025 61.646,101.422
CC1: R4.1 USB1.A5 | length 23.7
  Top Layer w0.254: R4.1@92.304,69.426 93.074,69.426 ; v1(93.421,69.774) 93.074,69.426 ; USB1.A5@101.962,73.987 101.962,73.806 v1(103.022,72.746) ; 93.074,69.426 cw(c93.074,70.078) 92.583,69.649 ccw(c93.074,70.078) 93.074,69.426 ; 93.074,69.426 ccw(c93.074,68.774) 92.583,69.204 cw(c93.074,68.774) 93.074,69.426 ; 102.642,73.126 cw(c102.261,72.746) 102.799,72.746 ccw(c102.261,72.746) 102.642,73.126 ; 102.642,73.126 ccw(c103.022,73.507) 103.022,72.969 cw(c103.022,73.507) 102.642,73.126 ; USB1.A5@102.275,73.868 ccw(c103.181,73.868) 102.541,73.227 cw(c103.181,73.868) USB1.A5@102.275,73.868
  Bottom Layer w0.254: v1(93.421,69.774) 94.513,69.774 98.933,74.193 101.6,74.193 v1@103.035,72.758 ; 93.96,69.774 cw(c93.96,70.312) 93.579,69.931 ccw(c93.96,70.312) 93.96,69.774 ; 93.96,69.774 ccw(c93.96,69.235) 93.579,69.616 cw(c93.96,69.235) 93.96,69.774 ; 102.624,73.17 cw(c102.2,72.746) 102.799,72.746 ccw(c102.2,72.746) 102.624,73.17 ; 102.685,73.108 ccw(c103.022,73.446) 103.022,72.969 cw(c103.022,73.446) 102.685,73.108
CC2: R5.1 USB1.B5 | length 30.5
  Top Layer w0.254: v1(90.246,70.612) 90.475,70.383 R5.1@90.475,69.477 ; USB1.B5@102.761,74.589 102.761,74.455 v1(103.505,73.711) ; 90.475,70.293 cw(c89.659,70.293) 90.236,69.716 ccw(c89.659,70.293) 90.475,70.293 ; 90.475,70.293 ccw(c91.291,70.293) 90.714,69.716 cw(c91.291,70.293) 90.475,70.293 ; 103.124,74.091 cw(c102.744,73.711) 103.282,73.711 ccw(c102.744,73.711) 103.124,74.091 ; 103.124,74.091 ccw(c103.505,74.472) 103.505,73.934 cw(c103.505,74.472) 103.124,74.091 ; v1@90.089,70.454 cw(c89.156,69.522) 90.475,69.522 ccw(c89.156,69.522) v1@90.089,70.454 ; v1@90.268,70.634 cw(c89.769,70.135) 90.475,70.135 ccw(c89.769,70.135) v1@90.268,70.634 ; USB1.B5@102.851,74.246 cw(c102.851,73.961) 103.053,74.163 ccw(c102.851,73.961) USB1.B5@102.851,74.246 ; USB1.B5@103.074,74.469 ccw(c103.865,74.469) 103.306,73.91 cw(c103.865,74.469) USB1.B5@103.074,74.469
  Bottom Layer w0.254: v1(90.246,70.612) 94.633,70.612 98.926,74.905 102.311,74.905 v1(103.505,73.711) ; 90.785,70.612 cw(c90.785,71.15) 90.404,70.77 ccw(c90.785,71.15) 90.785,70.612 ; 90.785,70.612 ccw(c90.785,70.074) 90.404,70.454 cw(c90.785,70.074) 90.785,70.612 ; 103.124,74.091 cw(c102.744,73.711) 103.282,73.711 ccw(c102.744,73.711) 103.124,74.091 ; 103.124,74.091 ccw(c103.505,74.472) 103.505,73.934 cw(c103.505,74.472) 103.124,74.091
CHAR_G: LED2.3 U3.12 | length 20.7
  Top Layer w0.203: U3.12@75.096,79.471 76.073,79.471 76.632,78.912 76.632,66.319 78.435,64.516 ; 78.621,64.33 78.435,64.516 ; LED2.3@80.233,63.279 79.672,63.279 ; 78.435,64.516 79.672,63.279 ; 79.672,63.279 cw(c79.672,62.976) 79.925,63.143 ccw(c79.672,62.976) 79.672,63.279 ; 79.672,63.279 ccw(c79.672,63.582) 79.925,63.416 cw(c79.672,63.582) 79.672,63.279
CHARG_EN: U1.8 U3.4 | length 57.5
  Top Layer w0.203: v1@71.757,73.725 ccw(c71.178,74.304) 71.997,74.304 ; v1(71.933,73.549) 71.997,73.613 71.997,75.565 ; 71.997,73.994 ccw(c72.377,73.994) v1@72.108,73.725 ; 71.997,74.613 71.997,75.565 ; U3.4@71.997,78.372 71.997,75.565
  Top Layer w0.254: U1.8@93.929,90.907 v1@93.929,92.329 ; 93.929,91.491 94.132,91.288 U1.8@94.132,91.237 ; v1@93.797,92.298 cw(c93.478,91.979) 93.929,91.979 ccw(c93.478,91.979) v1@93.797,92.298 ; 93.884,91.536 cw(c93.673,91.325) 93.961,91.245 ccw(c93.673,91.325) 93.884,91.536 ; 93.929,91.504 ccw(c94.439,91.504) 94.079,91.144 cw(c94.439,91.504) 93.929,91.504 ; 93.929,91.856 cw(c94.554,91.856) 94.112,92.298 ccw(c94.554,91.856) 93.929,91.856 ; v1@93.929,92.118 ccw(c95.052,92.118) 94.258,91.324 cw(c95.052,92.118) v1@93.929,92.118
  Bottom Layer w0.254: v1(71.933,73.549) 83.938,73.549 86.396,76.007 86.396,76.556 88.521,78.681 92.6,78.681 97.485,83.566 97.485,89.764 96.469,90.78 94.412,90.78 93.955,91.237 v1(93.955,92.456) ; v1@72.09,73.391 cw(c72.471,73.011) 72.471,73.549 cw(c72.471,74.087) v1@72.09,73.707 ; 93.955,91.918 cw(c94.493,91.918) 94.112,92.298 ccw(c94.493,91.918) 93.955,91.918 ; 93.955,91.918 ccw(c93.416,91.918) 93.797,92.298 cw(c93.416,91.918) 93.955,91.918
CHRG_R: LED2.1 U3.13 | length 20.8
  Top Layer w0.203: U3.13@75.096,79.871 76.212,79.871 77.013,79.07 77.013,76.683 ; 77.038,76.657 77.038,66.497 79.256,64.279 LED2.1@80.233,64.279 ; 79.533,64.279 cw(c79.533,63.68) 79.957,64.104 ccw(c79.533,63.68) 79.533,64.279 ; 79.533,64.279 ccw(c79.533,64.879) 79.957,64.455 cw(c79.533,64.879) 79.533,64.279
CHRG_STATE: U1.7 U3.5 | length 55
  Top Layer w0.203: U3.5@72.397,78.372 72.397,76.391 72.746,76.042 v1(72.746,72.635) ; v1@72.57,72.81 ccw(c72.146,73.234) 72.746,73.234 ccw(c73.345,73.234) v1@72.921,72.81
  Top Layer w0.254: U1.7@95.402,90.653 95.402,92.126 v1@95.428,92.151 ; 95.402,91.627 cw(c94.973,91.627) 95.277,91.324 ccw(c94.973,91.627) 95.402,91.627 ; 95.402,91.627 ccw(c95.832,91.627) 95.528,91.324 cw(c95.832,91.627) 95.402,91.627 ; v1@95.194,92.222 cw(c94.691,91.719) 95.402,91.719 ccw(c94.691,91.719) v1@95.194,92.222 ; 95.402,91.964 cw(c95.767,91.964) 95.509,92.222 ccw(c95.767,91.964) 95.402,91.964
  Bottom Layer w0.203: v1(72.746,72.635) 83.811,72.635 86.878,75.702 ; v1@72.921,72.459 cw(c73.345,72.035) 73.345,72.635 cw(c73.345,73.234) v1@72.921,72.81
  Bottom Layer w0.254: 86.878,75.702 86.904,75.728 86.904,76.346 88.731,78.173 92.811,78.173 97.993,83.356 97.993,90.373 97.079,91.288 95.631,91.288 95.352,91.567 v1(95.352,92.38) ; 95.352,91.841 cw(c95.89,91.841) 95.509,92.222 ccw(c95.89,91.841) 95.352,91.841 ; 95.352,91.841 ccw(c94.813,91.841) 95.194,92.222 cw(c94.813,91.841) 95.352,91.841